# Altium PCB HBridgeForShutter.PcbDoc
Units mm, origin at the board's own origin, x right, y up, seen from the top; angles counter-clockwise.
Board outline 52 x 45 mm, 2 copper layers (Top Layer, Bottom Layer); 26 components, 13 nets, 80 pads, 43 vias.
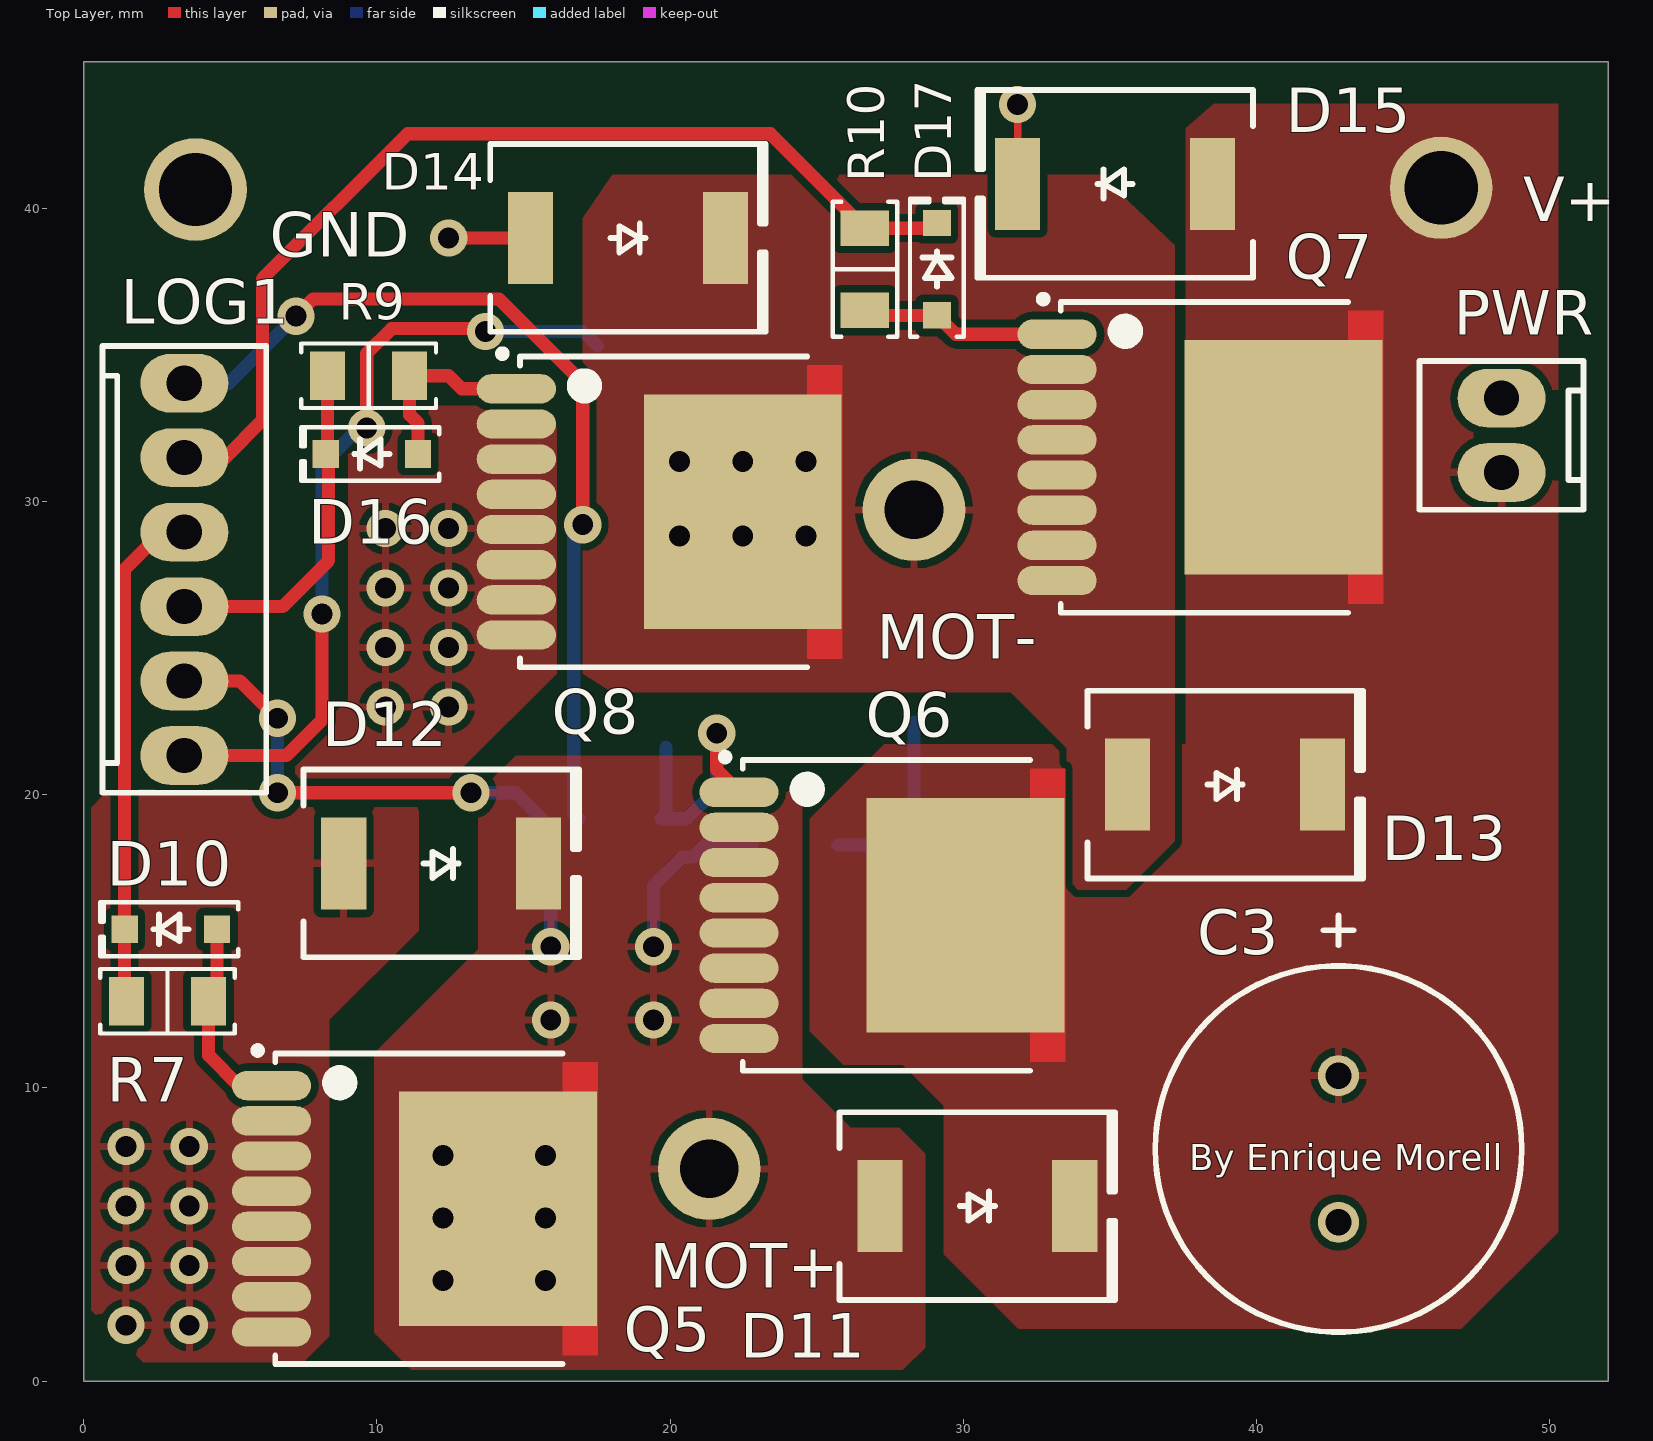
[diagram p0: Top Layer view]
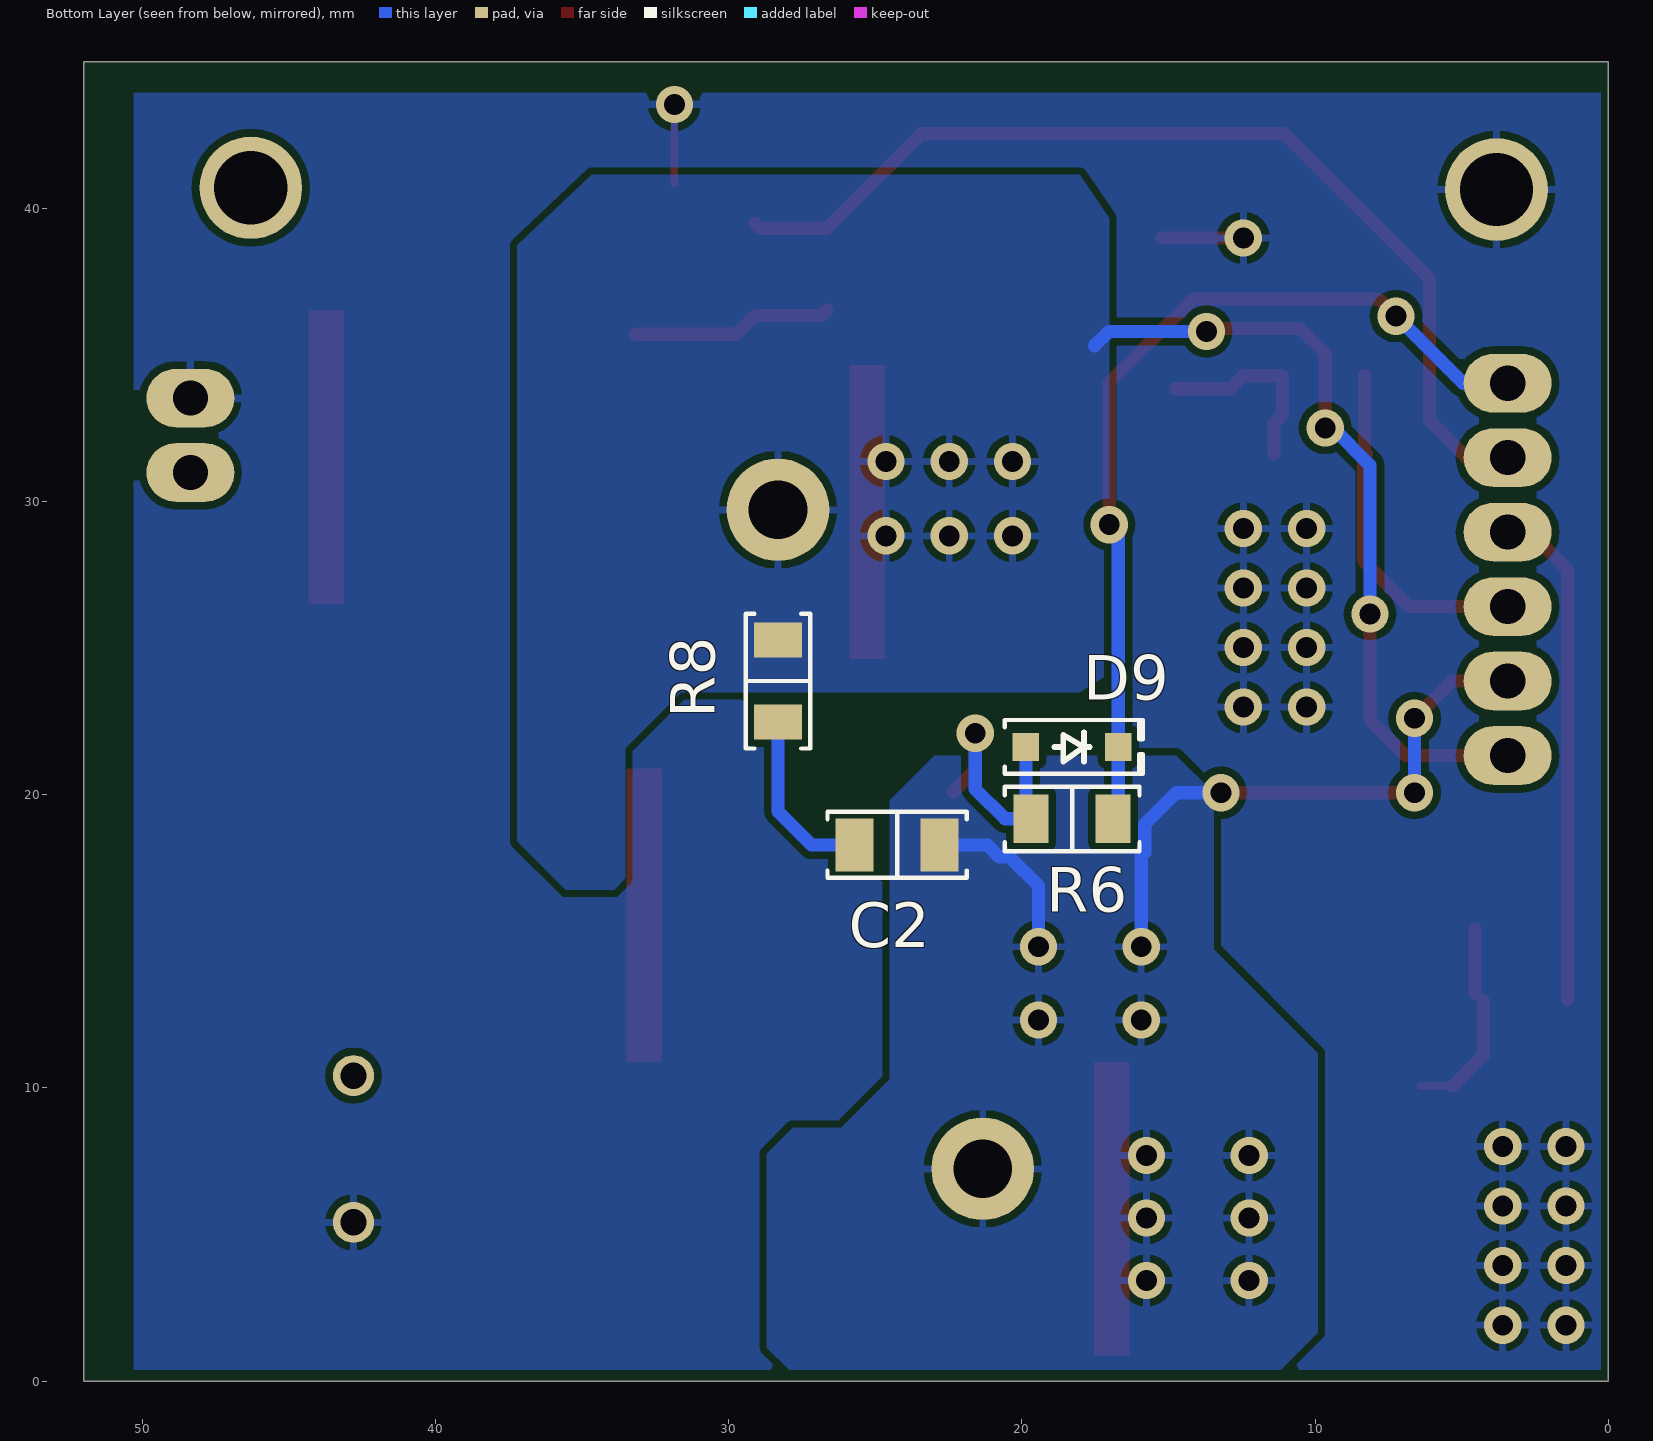
[diagram p1: Bottom Layer view, seen from below]
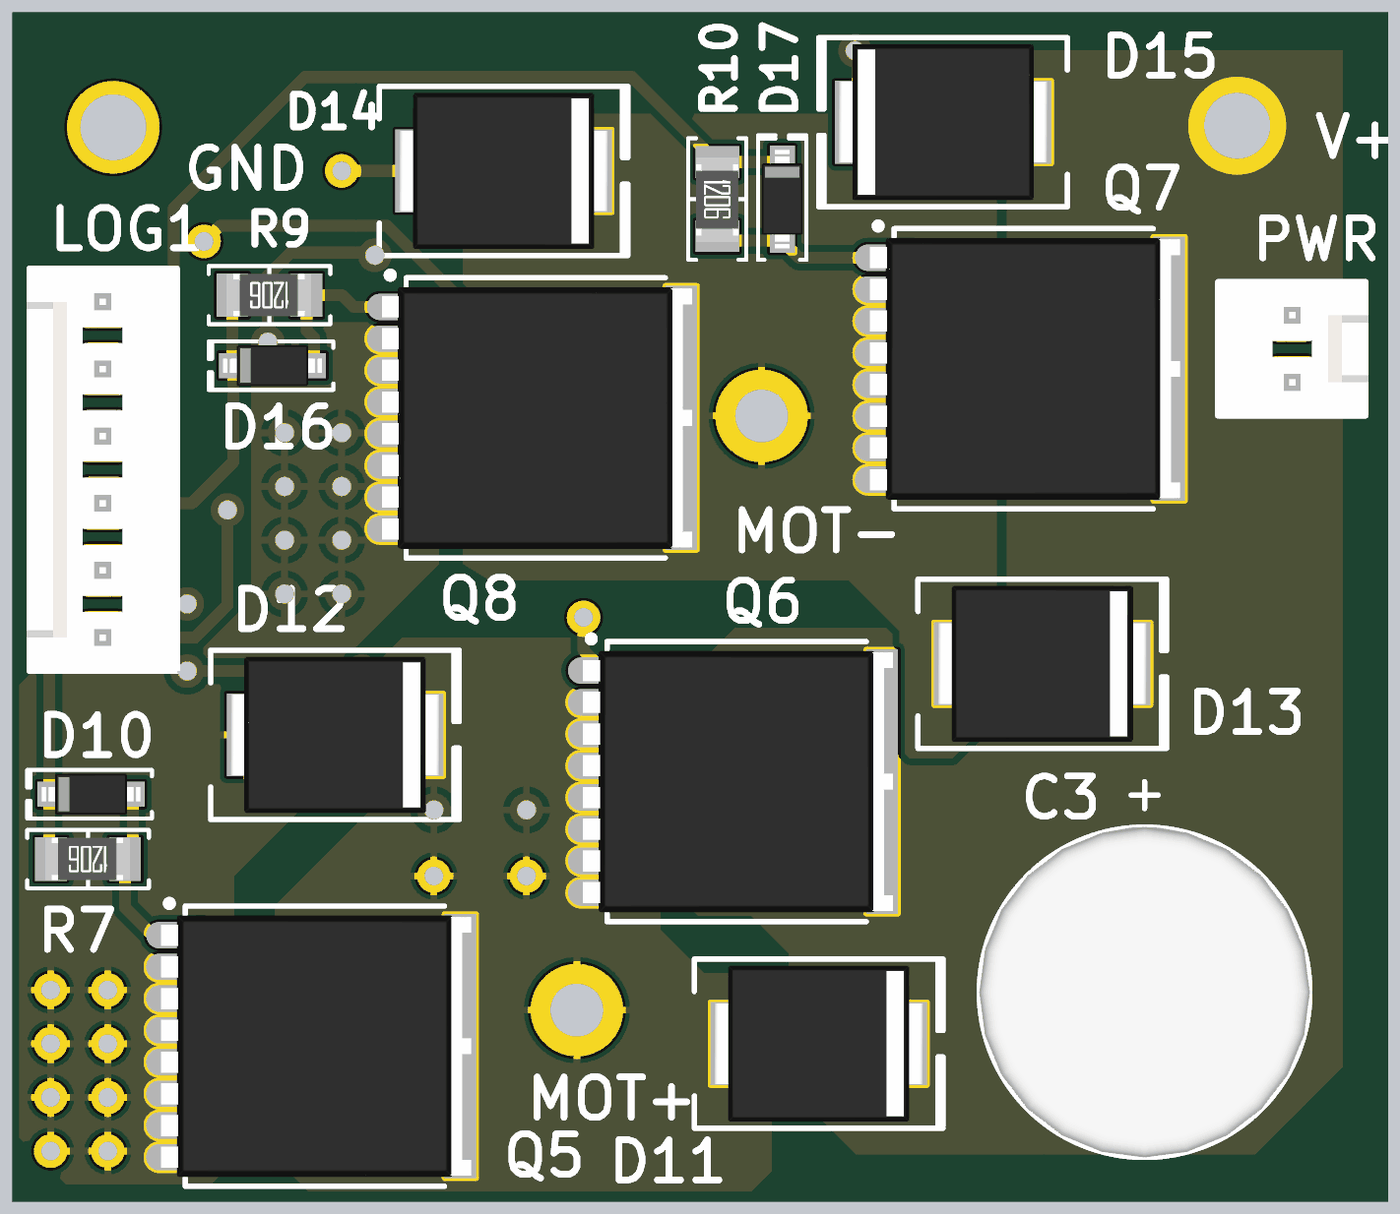
[diagram p2: 3D render of the assembled board from above, using the file's embedded part models]
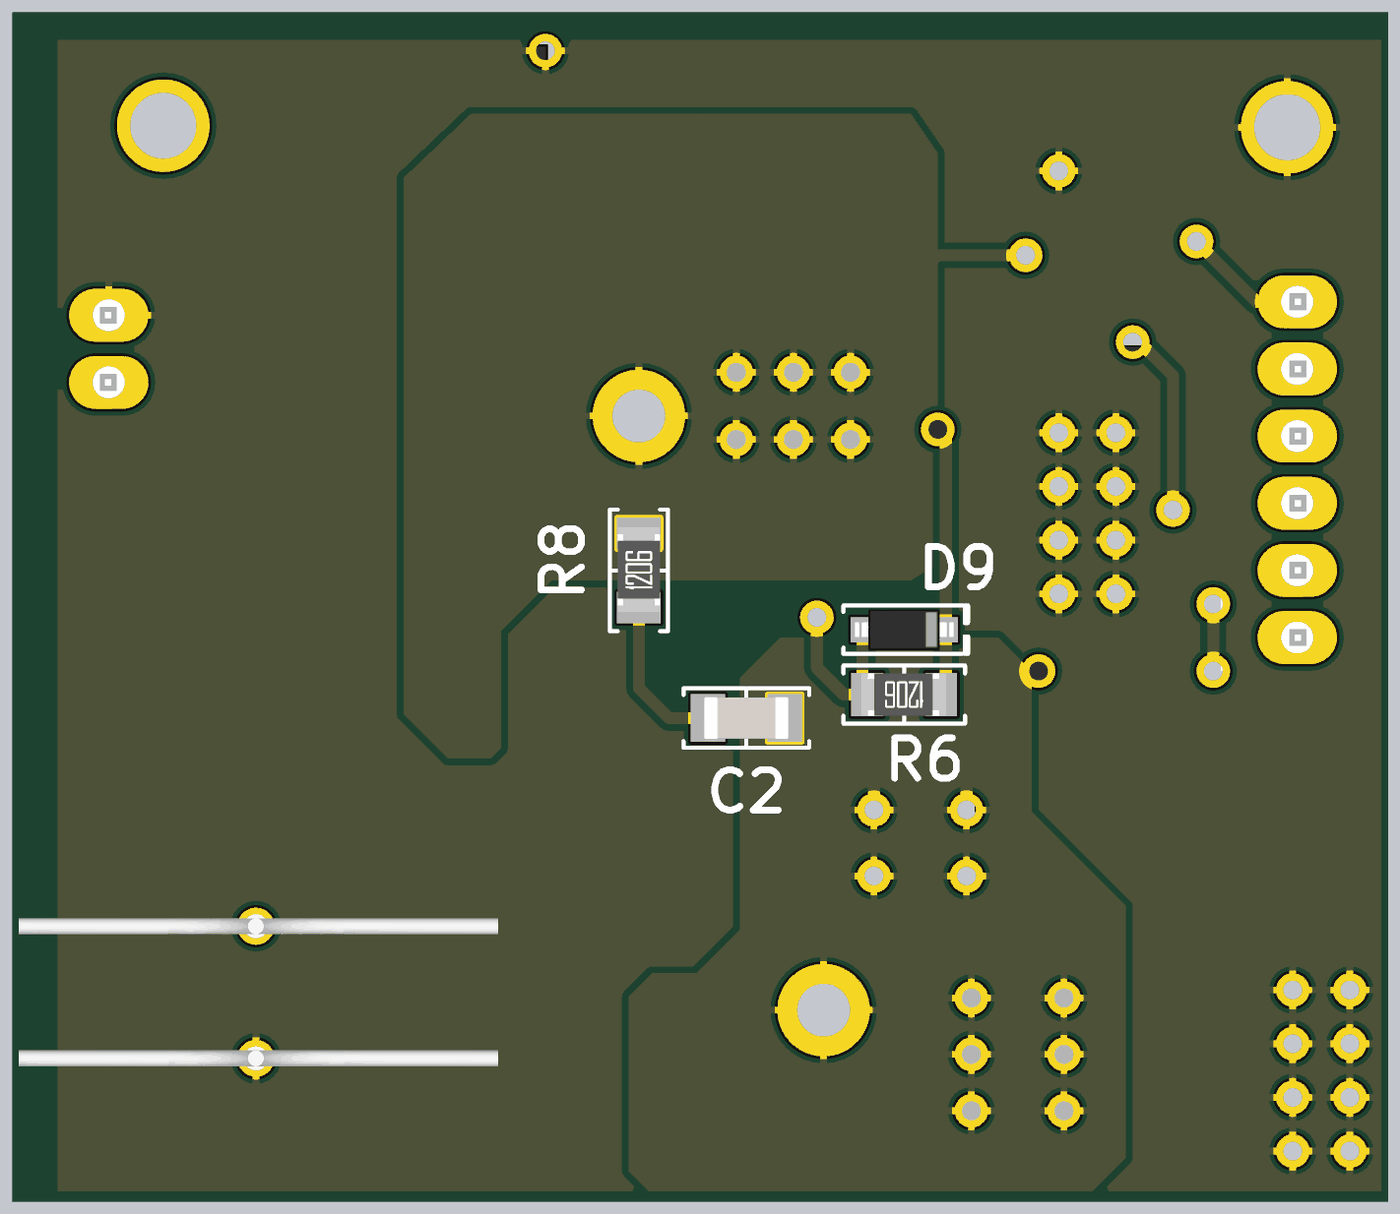
[diagram p3: 3D render of the assembled board from below, using the file's embedded part models]

## Layer stack, top to bottom
Top Solder: solder mask 0.0102, Solder Resist, Dk 3.5
Top Layer: signal copper 0.0356
Dielectric 1: dielectric 0.32, FR-4, Dk 4.8
Bottom Layer: signal copper 0.0356
Bottom Solder: solder mask 0.0102, Solder Resist, Dk 3.5

## Board outline
0,0 0,45 52,45 52,0

## Design rules (kind name [scope] priority, off if disabled: settings)
Clearance [All] p1: gap=0.254 ignorepadtopadclearanceinfootprint=TRUE except(0: Arc-Hole Track-Hole SMDPad-Hole THPad-Hole Via-Hole Fill-Hole Poly-Hole Region-Hole Text-Hole)
Height [All] p1: minheight=0 maxheight=45.4 prefheight=12.7
MinimumSolderMaskSliver [All] p1: minsoldermaskwidth=0.19
PolygonConnect PolygonConnect_HP [InNet('OUT1-')] p1: thpad.connectstyle=Relief thpad.reliefconductorwidth=0.254 thpad.reliefentries=4 thpad.polygonreliefangle="90 Angle" thpad.airgapwidth=0.254 smdpad.connectstyle=Direct smdpad.reliefconductorwidth=0.254 smdpad.reliefentries=4 smdpad.polygonreliefangle="90 Angle" smdpad.airgapwidth=0.254 via.connectstyle=Relief via.reliefconductorwidth=0.254 via.reliefentries=4 via.polygonreliefangle="90 Angle" via.airgapwidth=0.254
PolygonConnect PolygonConnect_HP_OUT+ [InNet('OUT1+')] p2: thpad.connectstyle=Relief thpad.reliefconductorwidth=0.254 thpad.reliefentries=4 thpad.polygonreliefangle="90 Angle" thpad.airgapwidth=0.254 smdpad.connectstyle=Direct smdpad.reliefconductorwidth=0.254 smdpad.reliefentries=4 smdpad.polygonreliefangle="90 Angle" smdpad.airgapwidth=0.254 via.connectstyle=Relief via.reliefconductorwidth=0.254 via.reliefentries=4 via.polygonreliefangle="90 Angle" via.airgapwidth=0.254
PolygonConnect PolygonConnect_HP_V+_1 [InNet('V+') vs HasFootprint('Cable Hole 6.54mm')] p3: thpad.connectstyle=Direct thpad.reliefconductorwidth=0.254 thpad.reliefentries=4 thpad.polygonreliefangle="90 Angle" thpad.airgapwidth=0.254 smdpad.connectstyle=Direct smdpad.reliefconductorwidth=0.254 smdpad.reliefentries=4 smdpad.polygonreliefangle="90 Angle" smdpad.airgapwidth=0.254 via.connectstyle=Relief via.reliefconductorwidth=0.254 via.reliefentries=4 via.polygonreliefangle="90 Angle" via.airgapwidth=0.254
PolygonConnect PolygonConnect_HP_V+ [InNet('V+')] p4: thpad.connectstyle=Relief thpad.reliefconductorwidth=0.254 thpad.reliefentries=4 thpad.polygonreliefangle="90 Angle" thpad.airgapwidth=0.254 smdpad.connectstyle=Direct smdpad.reliefconductorwidth=0.254 smdpad.reliefentries=4 smdpad.polygonreliefangle="90 Angle" smdpad.airgapwidth=0.254 via.connectstyle=Relief via.reliefconductorwidth=0.254 via.reliefentries=4 via.polygonreliefangle="90 Angle" via.airgapwidth=0.254
PolygonConnect PolygonConnect_HP_GND [InNet('GND') vs HasFootprint('INFINEON PG-HSOF-8-1')] p5: thpad.connectstyle=Relief thpad.reliefconductorwidth=0.254 thpad.reliefentries=4 thpad.polygonreliefangle="90 Angle" thpad.airgapwidth=0.254 smdpad.connectstyle=Direct smdpad.reliefconductorwidth=0.254 smdpad.reliefentries=4 smdpad.polygonreliefangle="90 Angle" smdpad.airgapwidth=0.254 via.connectstyle=Relief via.reliefconductorwidth=0.254 via.reliefentries=4 via.polygonreliefangle="90 Angle" via.airgapwidth=0.254
PolygonConnect [All] p6: connectstyle=Relief reliefconductorwidth=0.254 reliefentries=4 polygonreliefangle="90 Angle" airgapwidth=0.254
RoutingVias [All] p1: holewidth=0.711 width=1.27 viastyle="Through Hole" minholewidth=0.711 minwidth=1.27 maxholewidth=0.711 maxwidth=1.27
SilkToSolderMaskClearance [IsPad] p1: minsilkscreentomaskgap=0.15 clearancetoexposedcopper=TRUE
SolderMaskExpansion [All] p1: expansion=0.102
Width [All] p1: maxlimit=0.45 minlimit=0.254 preferedwidth=0.45
27 further rules are at their usual default settings.

## Components (designator, comment, footprint, x,y, rotation, side; value= is the part's Value field where it differs from the comment)
C2 "3.3uF" "CAP 1206/3216 - 1.8MM" 24.257,18.288 r0 bottom
C3 "680uF" "RADIAL CAPACITOR 12.5MM" 42.799,10.414 r270 top
D9 "SD101AW-7-F" SOD-123 18.288,21.631 r180 bottom
D10 "SD101AW-7-F" SOD-123 2.969,15.408 r180 top
D11 "SMCJ43CA" "ST DO214AB SMC" 30.48,5.969 r0 top
D12 "SMCJ43CA" "ST DO214AB SMC" 12.192,17.653 r0 top
D13 "SMCJ43CA" "ST DO214AB SMC" 38.932,20.343 r0 top
D14 "SMCJ43CA" "ST DO214AB SMC" 18.565,38.989 r0 top
D15 "SMCJ43CA" "ST DO214AB SMC" 35.179,40.834 r180 top
D16 "SD101AW-7-F" SOD-123 9.827,31.623 r180 top
D17 "SD101AW-7-F" SOD-123 29.1,37.924 r90 top
GND "Cable Hole 6.54mm" "Cable Hole 6.54mm"#1 3.81,40.64 r0 top (schematic designator GND_H1)
LOG1 "0022272061" "MOLEX KK 0022272061" 3.429,27.686 r270 top
MOT+ "H1" "Cable Hole 6.54mm"#2 21.336,7.239 r0 top (schematic designator MOTOR3)
MOT- "H2" "Cable Hole 6.54mm"#2 28.321,29.718 r0 top (schematic designator MOTOR4)
PWR "0022272021" "MOLEX KK 0022272021" 48.362,32.258 r90 top
Q5 "IPT020N10N3ATMA1" "INFINEON PG-HSOF-8-1" 11.43,5.875 r0 top
Q6 "IPT020N10N3ATMA1" "INFINEON PG-HSOF-8-1" 27.377,15.884 r0 top
Q7 "IPT020N10N3ATMA1" "INFINEON PG-HSOF-8-1" 38.227,31.505 r0 top
Q8 "IPT020N10N3ATMA1" "INFINEON PG-HSOF-8-1" 19.779,29.644 r0 top
R6 "5.1" "RES 1206/3216" 18.288,19.177 r0 bottom
R7 "5.1" "RES 1206/3216" 2.856,12.954 r180 top
R8 "5.1" "RES 1206/3216" 28.321,23.876 r90 bottom
R9 "5.1" "RES 1206/3216" 9.714,34.29 r180 top
R10 "5.1" "RES 1206/3216" 26.645,37.924 r270 top
V+ "Cable Hole 6.54mm" "Cable Hole 6.54mm"#1 46.3,40.7 r0 top (schematic designator V+_H1)

## Footprints (in the part's own frame and the unit in brackets; to place one, negate y for a bottom-side part, rotate by r counter-clockwise, add the part's x,y. Pads: shape width x height; smd on the part's side, far side on the other; paste and mask are expansions set on the pad)
"Cable Hole 6.54mm"#1 [mm] "Mount cable of 6.54mm AWG2"
  round 3.5 hole 2.5: 0(0,0)
"Cable Hole 6.54mm"#2 [mm] "Mount cable of 6.54mm AWG2"
  round 3.5 hole 2: 0(0,0)
"CAP 1206/3216 - 1.8MM" [mm] "Chip Capacitor, 2-Leads, Body 3.25x1.60mm, IPC Medium Density"
  rect 1.3x1.8 smd: 1(-1.45,0) 2(1.45,0)
  silkscreen extent -2.37,-1.12 2.37,1.12, body extent -1.6,-0.8 1.6,0.8, height 1.8
"INFINEON PG-HSOF-8-1" [mm] "PG-HSOF, 9-Leads, Body 10.58x11.68mm, Pitch 1.20mm, IPC Medium Density"
  oval 2.7x1 smd: 1(-5.025,4.2) 2(-5.025,3) 3(-5.025,1.8) 4(-5.025,0.6) 5(-5.025,-0.6) 6(-5.025,-1.8) 7(-5.025,-3) 8(-5.025,-4.2)
  rect 6.75x8 smd: 9(2.7,0)
  Top Layer region: 4.9,5 6.1,5 6.1,-5 4.9,-5
  silkscreen extent -5.62,-5.3 4.9,5.52, body extent -5.81,-4.95 5.92,4.95, height 2.3
"MOLEX KK 0022272021" [mm]
  oval 2x3 hole 1.2: 1(-1.27,0) 2(1.27,0)
  silkscreen extent -2.54,-2.79 2.54,2.79, body extent -2.54,-2.9 2.54,2.9, height 11.7
"MOLEX KK 0022272061" [mm]
  oval 2x3 hole 1.2: 1(-6.35,0) 2(-3.81,0) 3(-1.27,0) 4(1.27,0) 5(3.81,0) 6(6.35,0)
  silkscreen extent -7.62,-2.79 7.62,2.79, body extent -7.62,-2.9 7.62,2.9, height 11.7
"RADIAL CAPACITOR 12.5MM" [mm]
  round 1.4 hole 0.9: 1(0,0) 2(5,0)
  silkscreen extent -5.47,-6.25 8.75,6.25, body extent -3.75,-9.16 8.75,8.97, height 36.5
"RES 1206/3216" [mm] "Chip Resistor, 2-Leads, Body 3.13x1.55mm, IPC Medium Density"
  rect 1.2x1.65 smd: 1(-1.4,0) 2(1.4,0)
  silkscreen extent -2.3,-1.1 2.3,1.1, body extent -1.58,-0.8 1.62,0.8, height 0.6
SOD-123 [mm] "SOD, 2-Leads, Body 1.55x3.70mm, IPC Medium Density"
  rect 0.9x0.95 smd: 1(-1.575,0) 2(1.575,0)
  silkscreen extent -2.3,-0.92 2.41,0.92, body extent -1.86,-0.78 1.86,0.77, height 1.35
"ST DO214AB SMC" [mm] "Molded Diode, 2-Leads, Body 6.85x5.90mm, IPC Medium Density"
  rect 1.54x3.14 smd: 1(-3.325,0) 2(3.325,0)
  silkscreen extent -4.7,-3.2 4.7,3.2, body extent -3.97,-2.95 3.97,2.95, height 2.6

## Part data
C2: library part CGA5L3X7S2A335K160AB, "CAP CER 3.3UF 100V X7S 1206", Device Package="1206 (3216 Metric)", Manufacturer="TDK Corporation", Supplier Part Number 1=445-15583-2-ND, TemperatureCoefficient=X7S, TemperatureRange="-55C ~ 125C", Tolerance=10%, Voltage=100V, ComponentLink1Description=Datasheet, ComponentLink1URL=https://product.tdk.com/info/en/catalog/datasheets/mlcc_automotive_midvoltage_en.pdf, ComponentLink2Description="Digi-Key Listing", ComponentLink2URL=https://www.digikey.com/product-detail/en/tdk-corporation/CGA5L3X7S2A335K160AB/445-15583-2-ND/4278316, PartId=17985, Part Number=CGA5L3X7S2A335K160AB, Price=0.6319, Supplier 1=Digi-Key
C3: library part EEUFR1J681L, "CAP ALUM 680UF 20% 63V Through Hole", Device Package="Radial, Can", Lifetime @ Temp="10000 Hrs @ 105°C", Manufacturer=Panasonic, Ripple Current="2.78A @ 100kHz", Supplier Part Number 1=2079311, TemperatureRange="-40C ~ 105C", Tolerance=20%, Voltage=63V, ComponentLink1Description=Datasheet, ComponentLink1URL=http://www.farnell.com/datasheets/1897635.pdf?_ga=2.93240925.115427954.1506775348-490126870.1506116288&_gac=1.115494644.1506116288.CjwKCAjw6ZLOBRALEiwAxzyCWz0InfLjFu8mp1t2E94Bo3V2sP4VEUhaMoYFsFDilr1LV, ComponentLink2Description="Farnell Listing", ComponentLink2URL=http://fr.farnell.com/panasonic-electronic-components/eeufr1j681l/condensateur-elec-alu-680uf-63v/dp/2079311, Impedance="21 mOhms", PartId=7484, Part Number=EEUFR1J681L, Price=1.93, Supplier 1=Farnell, Type="General Purpose"
D9 D10 D16 D17: "DIODE SCHOTTKY 60V 15MA SOD123", Current Rectified="15mA (DC)", Current Reverse Leakage @ Vr="200nA @ 50V", Device Package=SOD-123, Junction Operating Temperature="-65C ~ 125C", Manufacturer="Diodes Incorporated", Supplier Part Number 1=SD101AW-7FDITR-ND, Voltage DC Reverse (Vr)=60V, Voltage Forward (Vf)="1V @ 15mA", ComponentLink1Description=Datasheet, ComponentLink1URL=http://www.diodes.com/_files/datasheets/ds11012.pdf, ComponentLink2Description="Digi-Key Listing", ComponentLink2URL=https://www.digikey.com/product-detail/en/diodes-incorporated/SD101AW-7-F/SD101AW-7FDITR-ND/1155357, PartId=14608, Part Number=SD101AW-7-F, Price=0.081, Reverse Recovery Time (trr)=1ns, Supplier 1=Digi-Key, Type=Schottky
D11 D12 D13 D14 D15: "TVS DIODE 43VWM 69.4VC SMC", Current - Peak Pulse="21.6 (10/1000)", Device Package="DO-214AB, SMC", Manufacturer=FAIRCHILD, Operating Temperature="-55C ~ 150C (TJ)", Power - Peak Pulse="1500W (1.5kW)", Supplier Part Number 1=1651632, Voltage (Breakdown)=52.8V, Voltage (Clamping)=69.4V, Voltage (Reverse Standoff)=43V, Bidirectional Channels=1, ComponentLink1Description=Datasheet, ComponentLink1URL=https://www.fairchildsemi.com/datasheets/SM/SMCJ100A.pdf, ComponentLink2Description="Farnell Listing", ComponentLink2URL=http://fr.farnell.com/on-semiconductor-fairchild/smcj43ca/diode-tvs/dp/1651632, PartId=14960, Part Number=SMCJ43CA, Price=0.492, Supplier 1=Farnell, Type=Zener
GND MOT+ MOT- V+: library part "Cable Pad AWG 2", Number Of Positions=1, PartId=10977, Part Number="Cable Pad AWG 2"
LOG1: "CONN HEADER 6POS .100 VERT TIN", Colour=Natural, Manufacturer="Molex, LLC", Supplier Part Number 1=WM4115-ND, ComponentLink1Description=Datasheet, ComponentLink1URL=http://www.molex.com/pdm_docs/sd/022272061_sd.pdf, ComponentLink2Description="Digi-Key Listing", ComponentLink2URL=http://www.digikey.com/product-search/en?keywords=22-27-2061, Contact Finish=Tin, Fastening Type="Friction Lock", Number Of Positions=6, Number Of Rows=1, PartId=9723, Part Number=0022272061, Pitch="0.100\" (2.54mm)", Price=0.47, Series="KK 6410", Supplier 1=Digi-Key, Type="Header, Unshrouded"
PWR: "CONN HEADER 2POS .100 VERT TIN", Colour=Natural, Manufacturer="Molex, LLC", Supplier Part Number 1=WM4111-ND, ComponentLink1Description=Datasheet, ComponentLink1URL=http://www.molex.com/pdm_docs/sd/022272021_sd.pdf, ComponentLink2Description="Digi-Key Listing", ComponentLink2URL=http://www.digikey.com/product-search/en?keywords=22-27-2021, Contact Finish=Tin, Fastening Type="Friction Lock", Number Of Positions=2, Number Of Rows=1, PartId=9719, Part Number=0022272021, Pitch="0.100\" (2.54mm)", Price=0.25, Series="KK 6410", Supplier 1=Digi-Key, Type="Header, Unshrouded"
Q5 Q6 Q7 Q8: "MOSFET N-CH 100V 300A 8HSOF", Current Continuous Drain="300A (Tc)", Device Package=8-PowerSFN, Drain to Source Voltage (Vdss)=100V, Input Capacitance (Ciss) at Vds="11200pF @ 50V", Manufacturer="Infineon Technologies", Power - Max=375W, Supplier Part Number 1=IPT020N10N3ATMA1TR-ND, ComponentLink1Description=Datasheet, ComponentLink1URL=http://www.infineon.com/dgdl/IPT020N10N3_Rev1.1.pdf?folderId=db3a304313b8b5a60113cee8763b02d7&fileId=db3a30433e9d5d11013e9e58035b0158, ComponentLink2Description="Digi-Key Listing", ComponentLink2URL=http://www.digikey.com/product-detail/en/IPT020N10N3ATMA1/IPT020N10N3ATMA1TR-ND/4571872, Features=Standard, Gate Charge (Qg)="156nC @ 10V", PartId=7970, Part Number=IPT020N10N3ATMA1, Price=3.3442, Rds On (Max) at Id, Vgs="2 mOhm @ 150A, 10V", Supplier 1=Digi-Key, Type="MOSFET N-Channel, Metal Oxide", Vgs(th) (Max) at Id="3.5V @ 272uA"
R6 R7 R8 R9 R10: library part ERJ-8GEYJ5R1V, "RES SMD 5.1 OHM 5% 1/4W 1206", Device Package="1206 (3216 Metric)", Manufacturer="Panasonic Electronic Components", PowerRating="0.25W, 1/4W", Supplier Part Number 1=P5.1ETR-ND, TemperatureCoefficient="-100/ +600ppm/C", TemperatureRange="-55C ~ 155C", Tolerance=5%, ComponentLink1Description=Datasheet, ComponentLink1URL=http://industrial.panasonic.com/www-cgi/jvcr13pz.cgi?E+PZ+3+AOA0001+ERJ8GEYJ5R1V+7+WW, ComponentLink2Description="Digi-Key Listing", ComponentLink2URL=https://www.digikey.com/product-detail/en/panasonic-electronic-components/ERJ-8GEYJ5R1V/P5.1ETR-ND/282211, PartId=11913, Part Number=ERJ-8GEYJ5R1V, Price=0.0045, Supplier 1=Digi-Key

## Via types
v1: diameter 1.27, hole 0.711, Top Layer to Bottom Layer, 22 vias
v2: diameter 1.27, hole 0.711, Top Layer to Bottom Layer, tented top, 21 vias

## Nets (pads, with @x,y where several pads share a name; then routed paths per layer and width w, separated by ;. In a path a pad name is that pad's centre, name@x,y a point inside that pad or via, vN(x,y) a via of type N, cw(c..) or ccw(c..) an arc to the next point about the centre after c; other vN are vias at no path point)
GND: C3.2 D12.1 D14.1 D15.2 GND.0 PWR.2 Q5.2 Q5.3 Q5.4 Q5.5 Q5.6 Q5.7 Q5.8 Q8.2 Q8.3 Q8.4 Q8.5 Q8.6 Q8.7 Q8.8 | length 5.5
  Top Layer w0.254: D15.2 v2(31.854,43.538)
  Top Layer w0.45: v1(12.446,38.989) D14.1
  other v1: 1.441,1.904 3.6,1.904 1.441,3.936 3.6,3.936 1.441,5.968 3.6,5.968 1.441,8 3.6,8
  other v2: 10.287,22.987 12.446,22.987 10.287,25.019 12.446,25.019 10.287,27.051 12.446,27.051 10.287,29.083 12.446,29.083
NetC2_2: C2.2 R8.1 | length 6.1
  Bottom Layer w0.45: C2.2 27.178,18.288 28.321,19.431 R8.1
NetD9_1: D9.1 Q6.1 R6.2 | length 9.1
  Top Layer w0.45: v1(21.59,22.098) 21.59,20.846 Q6.1
  Bottom Layer w0.45: D9.1 19.863,19.352 R6.2 20.574,19.177 21.59,20.193 v1(21.59,22.098)
NetD9_2: D9.2 LOG1.1 R6.1 | length 31.2
  Top Layer w0.45: v1(7.239,36.322) 7.829,36.912 14.161,36.912 17.018,34.055 v2(17.018,29.21)
  Bottom Layer w0.45: LOG1.1 4.953,34.036 v1(7.239,36.322) ; R6.1 16.713,19.352 D9.2 16.713,29.21 v2(17.018,29.21)
NetD10_1: D10.1 Q5.1 R7.1 | length 7
  Top Layer w0.254: R7.1 R7.1@4.544,13.242 ; Q5.1@5.292,10.075 Q5.1
  Top Layer w0.45: R7.1 4.256,11.111 Q5.1@5.292,10.075 ; R7.1@4.544,13.242 D10.1
NetD10_2: D10.2 LOG1.3 R7.2 | length 17.3
  Top Layer w0.254: R7.2@1.394,13.016 R7.2
  Top Layer w0.45: R7.2@1.394,13.016 D10.2 1.394,27.683 2.667,28.956 LOG1.3
NetD16_1: D16.1 Q8.1 R9.1 | length 6.6
  Top Layer w0.45: D16.1 11.402,32.667 11.114,32.955 R9.1 12.446,34.29 12.892,33.844 Q8.1
NetD16_2: D16.2 LOG1.4 R9.2 | length 11.9
  Top Layer w0.254: D16.2 D16.2@8.314,31.685
  Top Layer w0.45: LOG1.4 6.782,26.416 8.353,27.987 8.353,31.522 D16.2 ; D16.2@8.314,31.685 R9.2
NetD17_1: D17.1 Q7.1 R10.2 | length 6.9
  Top Layer w0.45: R10.2 26.82,36.349 D17.1 29.743,35.705 Q7.1
NetD17_2: D17.2 LOG1.2 R10.1 | length 34.5
  Top Layer w0.45: LOG1.2 4.826,31.496 6.096,32.766 6.096,37.592 11.049,42.545 23.424,42.545 R10.1 28.925,39.324 D17.2
OUT1+: C2.1 D11.1 D12.2 LOG1.5 MOT+.0 Q5.9 Q6.2 Q6.3 Q6.4 Q6.5 Q6.6 Q6.7 Q6.8 | length 26.5
  Top Layer w0.45: LOG1.5 5.334,23.876 v2(6.604,22.606) ; v2(6.604,20.066) v2(13.208,20.066)
  Bottom Layer w0.45: LOG1.5 LOG1.5@3.81,23.876 ; v2(6.604,20.066) v2(6.604,22.606) ; v2(13.208,20.066) 14.732,20.066 15.809,18.989 15.809,18.032 15.931,17.91 v2(15.931,14.813) ; v2(19.431,14.813) 19.431,16.891 20.413,17.873 20.767,17.873 21.182,18.288 C2.1
  other v1: 12.248,3.429 15.748,3.429 12.248,5.562 15.748,5.562 12.248,7.696 15.748,7.696 15.931,12.313 19.431,12.313
OUT1-: D13.1 D14.2 LOG1.6 MOT-.0 Q7.2 Q7.3 Q7.4 Q7.5 Q7.6 Q7.7 Q7.8 Q8.9 R8.2 | length 27
  Top Layer w0.45: LOG1.6 6.909,21.336 8.128,22.555 v2(8.128,26.162) ; v2(9.652,32.512) 9.652,35.052 10.5,35.9 13.598,35.9 v2(13.7,35.798)
  Bottom Layer w0.45: v2(8.128,26.162) 8.128,31.242 9.398,32.512 v2(9.652,32.512) ; v2(13.7,35.798) 17.034,35.798 17.526,35.306
  other v1: 20.32,28.829 22.479,28.829 24.638,28.829
  other v2: 20.32,31.369 22.479,31.369 24.638,31.369
V+: C3.1 D11.2 D13.2 D15.1 PWR.1 Q6.9 Q7.9 V+.0

## Polygon pours and split planes (outlines as drawn)
OUT1- on Bottom Layer "OUT1-_L02_P001" (solid, remove dead copper, pour order 1): 37.211,38.735 37.211,18.415 35.56,16.764 33.909,16.764 33.528,17.145 33.528,21.59 31.623,23.495 18.034,23.495 17.018,24.124 17.018,39.663 18.034,41.148 34.671,41.148
GND on Bottom Layer "GND_L02_P000" (solid, remove dead copper, pour order 2): 0.254,43.942 50.292,43.942 50.292,0.381 0.254,0.381
GND on Top Layer "GND_L01_P015" (solid, remove dead copper, pour order 15): 15.367,33.274 16.129,32.512 16.129,24.13 11.43,19.431 11.43,15.367 8.382,12.319 8.382,1.524 7.493,0.635 2.032,0.635 0.254,2.413 0.254,19.558 0.889,20.193 5.969,20.193 9.017,23.241 9.017,32.131 10.16,33.274
OUT1+ on Top Layer "OUT1+_L01_P010" (solid, remove dead copper, pour order 10): 11.176,0.381 9.906,1.651 9.906,11.176 13.462,14.732 13.462,20.066 14.732,21.336 22.987,21.336 24.511,19.812 24.511,10.287 26.162,8.636 27.813,8.636 28.702,7.747 28.702,1.143 27.94,0.381
V+ on Top Layer "V+_L01_P008" (solid, remove dead copper, pour order 8): 24.765,19.177 27.305,21.717 37.592,21.717 37.592,42.738 38.538,43.561 50.292,43.561 50.292,5.08 46.99,1.778 31.877,1.778 29.337,4.318 29.337,9.398 27.94,10.795 25.908,10.795 24.765,11.938
OUT1- on Top Layer "OUT1-_L01_P006" (solid, remove dead copper, pour order 6): 37.211,38.735 37.211,18.415 35.56,16.764 33.909,16.764 33.528,17.145 33.528,21.59 31.623,23.495 18.034,23.495 17.018,24.124 17.018,39.663 18.034,41.148 34.671,41.148
OUT1+ on Bottom Layer "OUT1+_L02_P000" (solid, remove dead copper, pour order 0): 11.176,0.381 9.906,1.651 9.906,11.176 13.462,14.732 13.462,20.066 14.732,21.336 22.987,21.336 24.511,19.812 24.511,10.287 26.162,8.636 27.813,8.636 28.702,7.747 28.702,1.143 27.94,0.381

## Silkscreen, mask and mechanical layers (free items; w line width, h text height)
Top Overlay:
  text "By Enrique Morell" at 37.7,6.9 h1.52
Mechanical 1:
  the board outline again, w0.1
Mechanical 13:
  circle w0.1: c14.783,34.108 r0.5
  lines w0.1: 13.883,24.428 13.883,35.008 23.983,35.008 23.983,24.428
Mechanical 15:
  lines w0.05: 12.733,24.168 25.133,24.168 25.133,35.268 12.733,35.268 12.733,24.168
  lines w0.1: 18.433,29.718 19.433,29.718 ; 18.933,29.218 18.933,30.218